# Altium PCB M18PNP新 - 副本.PCBDOC
Units mil, origin at the board's own origin, x right, y up, seen from the top; angles counter-clockwise.
Board outline 6000 x 4000 mil, 2 copper layers (Top Layer, Bottom Layer); 52 components, 35 nets, 144 pads, 8 vias.
Unrouted connection lines stored in the file: 75.
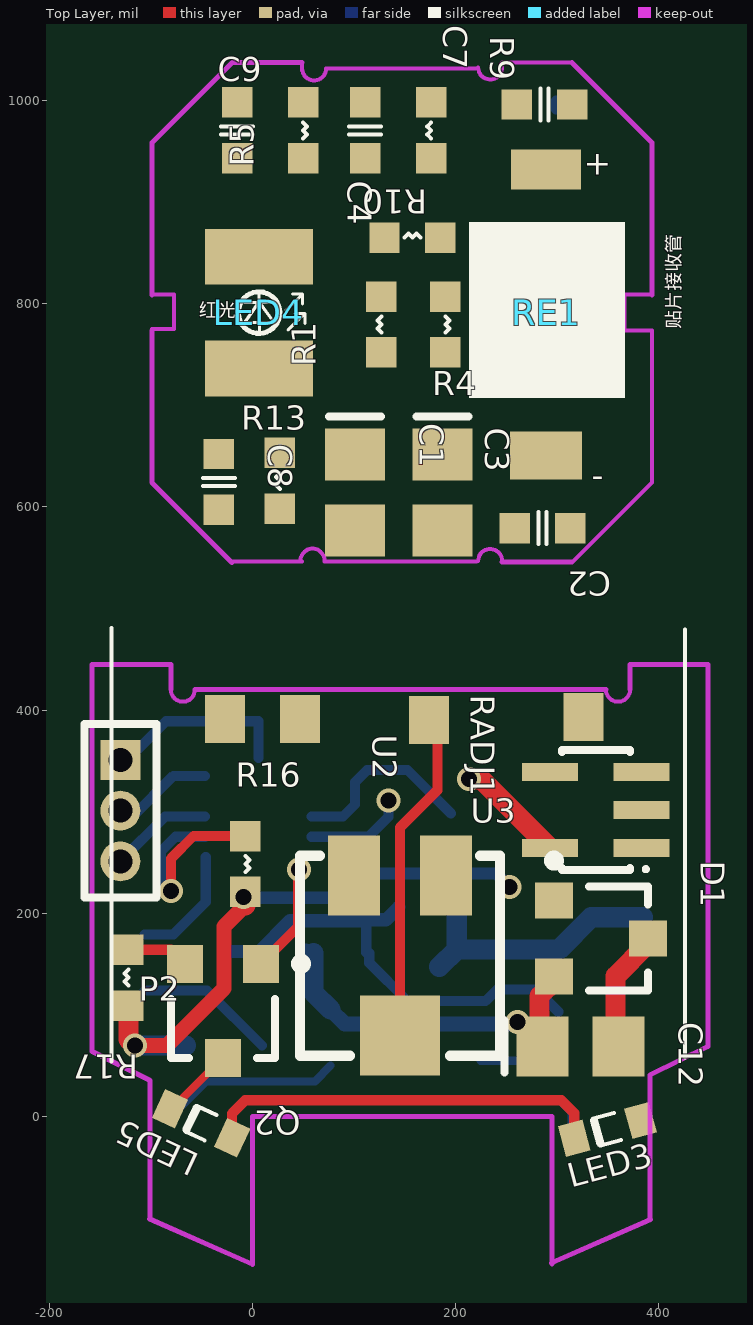
[diagram p0: Top Layer view]
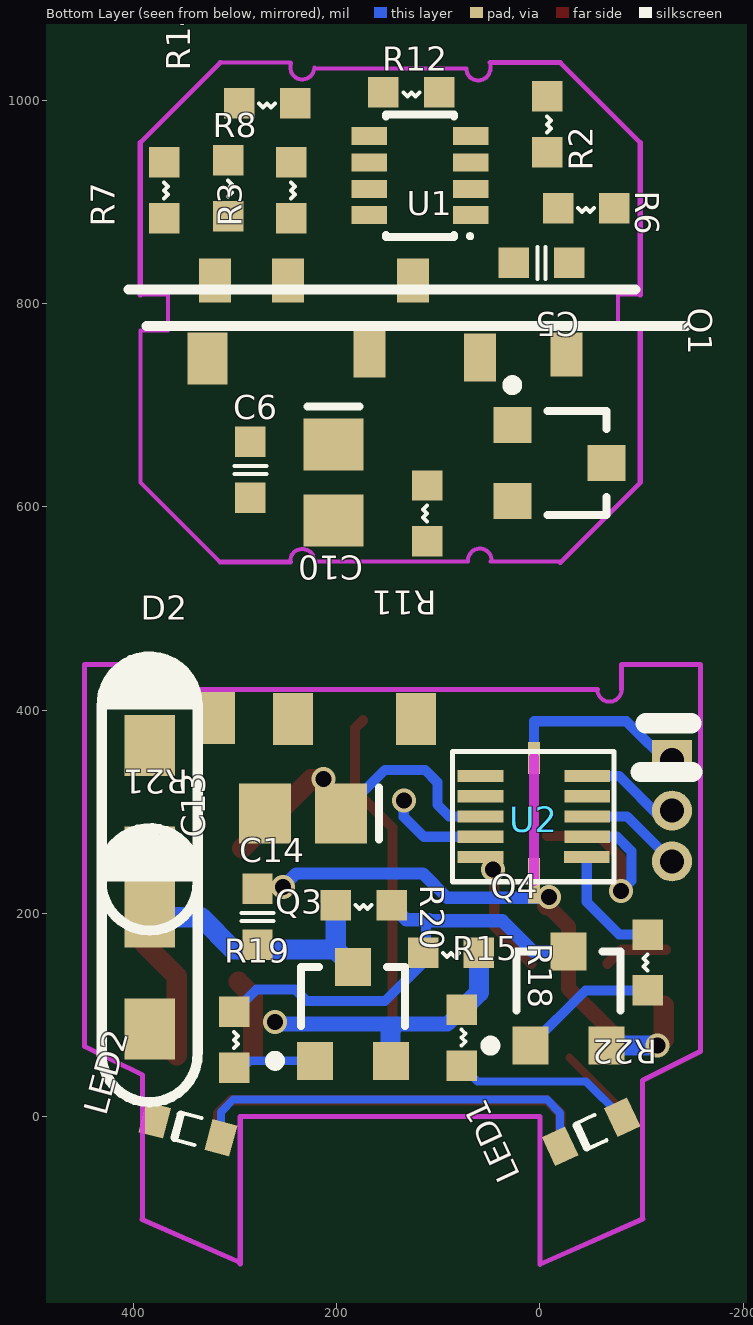
[diagram p1: Bottom Layer view, seen from below]

## Layer stack, top to bottom
Top Layer: signal copper 1.4
Dielectric: dielectric 12.6, FR-4, Dk 4.8
Bottom Layer: signal copper 1.4

## Board outline
-1163.58,-1077.4 4836.42,-1077.4 4836.42,2922.6 -1163.58,2922.6

## Design rules (kind name [scope] priority, off if disabled: settings)
Clearance [All] p1: gap=10
PolygonConnect [All] p1: connectstyle=Relief reliefconductorwidth=10 reliefentries=4 polygonreliefangle="90 Angle"
RoutingVias [All] p1: holewidth=15.75 width=23.62 viastyle="Through Hole" minholewidth=15.75 minwidth=23.62 maxholewidth=15.75 maxwidth=23.62
SilkscreenOverComponentPads [All] p1: minsilkscreentomaskgap=10
SolderMaskExpansion [All] p1: expansion=4
TestPointUsage [All] p1: valid=0 allowmultiple=FALSE
Testpoint [All] p1: side=15 testpointundercomponent=TRUE minsize=40 maxsize=100 preferedsize=60 minholesize=0 maxholesize=40 preferedholesize=32 testpointgrid=1 style=1023 order=0-112345678
Width [All] p1: maxlimit=30 minlimit=8 preferedwidth=10
23 further rules are at their usual default settings.

## Components (designator, comment, footprint, x,y, rotation, side; value= is the part's Value field where it differs from the comment)
C1 "105" C0805 101,614 r270 top
C2 "C104" C0603 313,579 r180 top
C3 "C106" C0805 187,614 r270 top
C4 "C104" C0603 111,943 r90 top
C5 "C104" C0603 -29,840 r0 bottom
C6 "C104" C0603 285,609 r90 bottom
C7 "C104" C0603 260,996 r0 top
C8 "C104" C0603 -33,652 r270 top
C9 "C104" C0603 -15,943 r90 top
C10 "C106" C0805 203,624 r270 bottom
C12 "105" C0805 323,69 r0 top
C13 "C106" C0805 233,298 r0 bottom
C14 "C104" C0603 278,169 r90 bottom
D1 "sm05t1g" SOT23A 343,175 r270 top
D2 "tvs36V" 3216A 385,365 r90 bottom
LED1 "绿" d0603 -81,-1 r335 bottom
LED2 "绿" d0603 314,-21 r15 bottom
LED3 "橙色" d0603 382,-4 r195 top
LED4 "红光" LED-1210#1 6.47,791.16 r0 top locked
LED5 "橙色" d0603 -20,-21 r155 top
P2 "MHDR1X3" MHDR1X3 -130,351 r270 top
Q1 "BC817" SOT23A -19,643 r270 bottom
Q2 "c124" SOT23A -29,104 r180 top
Q3 "BC807" SOT23A 184,101 r180 bottom
Q4 "BC817" SOT23A -28,116 r180 bottom
R1 "100" R0603 127,752 r90 top
R2 "390K" R0603-A -7,1004 r90 bottom
R3 "100K" R0603-A 245,939 r90 bottom
R4 "R101" R0603-A 190,807 r90 top
R5 "0" R0603-A 50,998 r90 top
R6 "0" R0603-A -73,894 r180 bottom
R7 "10K" R0603-A 370,939 r90 bottom
R8 "20" R0603-A 307,941 r90 bottom
R9 "R103" R0603-A 176,943 r270 top
R10 "R562" R0603-A 130,865 r180 top
R11 "10K" R0603-A 111,566 r270 bottom
R12 "R202" R0603-A 99,1008 r180 bottom
R13 "15" R0603-A 27,598 r270 top
R14 "R562" R0603-A 241,997 r180 bottom
R15 "10K" R0603-A 77,105 r90 bottom
R16 "2K" R0603-A -7,276 r90 top
R17 "2K" R0603-A -122,109 r270 top
R18 "10K" R0603-A 60,161 r180 bottom
R19 "10K" R0603-A 301,103 r90 bottom
R20 "R000" R0603-A 146,208 r180 bottom
R21 "SMD1206P016" 3216A 385,196 r90 bottom
R22 "2K" R0603-A -106,124 r270 bottom
RADJ1 "20K" POT4MM-2 145.15,158.2 r270 top
RE1 "贴片接收管" LED-1210#2 289.06,791.06 r180 top locked
U1 "OPA2338" SOT23-8 68,887 r90 bottom
U2 "C8051F300" IC* -19,316 r270 top
U3 "MIC5233-3.3BM5" SOT-457 383,264 r90 top

## Footprints (in the part's own frame and the unit in brackets; to place one, negate y for a bottom-side part, rotate by r counter-clockwise, add the part's x,y. Pads: shape width x height; smd on the part's side, far side on the other; paste and mask are expansions set on the pad)
3216A [mil]
  rect 60x50 smd: 1(0.12,-0.87) 2(-109.88,-0.87)
  silkscreen extent -182,-48 88,46
C0603 [mil]
  rect 30x30 smd: 1(0,0) 2(55,0)
  silkscreen extent 24,-16 31,16
C0805 [mm] "Chip Capacitor; Body 2.0 x 1.2 mm (LxW typ)"
  rect 1.3x1.5 smd: 1(-0.95,0) 2(0.95,0)
  silkscreen extent -1.9,-0.65 -1.9,0.65
d0603 [mm]
  rect 0.635x0.8 smd: 1(0,0) 2(1.715,0)
  silkscreen extent 0.6,-0.35 1.13,0.35
IC* [mil]
  rect 12x45 smd far side: 1(-19.21,77.42) 2(0.79,77.42) 3(20.79,77.42) 4(40.79,77.42) 7(40.79,-27.58) 8(20.79,-27.58) 9(0.79,-27.58) 10(-19.21,-27.58)
  rect 12x45 smd far side mask+2: 5(60.79,77.42) 6(60.79,-27)
  rect 31.5x12 smd far side: 11(-37,25)
  rect 45x12 smd far side: 11(84,25)
LED-1210#1 [mil]
  rect 106.3x55 smd: 1(0,-55) 2(0,55)
  silkscreen extent -20,-20 45,20
LED-1210#2 [mil]
  rect 68.9x39.37 smd: 1(0,-140.75)
  rect 70.87x47.24 smd: 2(0,140.75)
  silkscreen extent -20,-20 45,20
MHDR1X3 [mm] "Connector; Header; 3 Position"
  rect 1x1 hole 0.6: 1(0,0)
  round 1 hole 0.6: 2(1.27,0) 3(2.54,0)
  silkscreen extent -0.9,-0.9 3.44,0.9
POT4MM-2 [mm] "Square Trimming Potentiometer"
  rect 2x1.3 smd: CCW(-2,-1.15) CW(-2,1.15)
  rect 2x2 smd: W(2,0)
  silkscreen extent -2.5,-2.5 2.5,2.5
R0603 [mil]
  rect 30x30 smd: 1(0,0) 2(55,0)
  silkscreen extent 20,0 35,4
R0603-A [mil]
  rect 30x30 smd: 1(0,0) 2(-55,0)
  silkscreen extent -35,-4 -20,0
SOT23-8 [mm]
  rect 0.45x0.889 smd: 1(0,0) 2(0.66,0) 3(1.32,0) 4(1.98,0) 5(1.98,2.54) 6(1.32,2.54) 7(0.66,2.54) 8(0,2.54)
  silkscreen extent -0.57,-0.03 2.52,2.12
SOT23A [mm] "SOT-23; 3 Leads; Body 3.0 x 2.5 mm, inc. leads (LxW max)"
  rect 0.9x0.95 smd: 1(-0.95,-1.175) 2(0.95,-1.175) 3(0,1.175)
  silkscreen extent -2.07,-1.3 1.3,1.18
SOT-457 [mm]
  rect 0.45x1.397 smd: 1(0,0) 2(0.95,0) 3(1.9,0) 4(1.9,2.286) 5(0,2.286)
  silkscreen extent -0.57,-0.16 2.45,1.99

## Part data
C1 C2 C3 C4 C5 C6 C7 C8 C9 C10 C12 C13 C14: library part Cap, "Capacitor"
D2: library part "D Schottky", "Schottky Diode"
LED1 LED2 LED3 LED4 LED5: library part LED0, "Typical INFRARED GaAs LED"
P2: "Header, 3-Pin"
Q1 Q2 Q4: library part MMBT3904, "NPN Switching Transistor"
Q3: library part MMBT3906, "PNP Switching Transistor"
R1 R2 R3 R4 R5 R6 R7 R8 R9 R10 R11 R12 R13 R14 R15 R16 R17 R18 R19 R20 R21 R22: library part Res2, "Resistor"
RADJ1: library part "RPot SM", "Square Trimming Potentiometer"
RE1: library part "Photo Sen", "Photosensitive Diode"
U1: library part LM833D, "Dual Low Noise, Audio Amplifier"
U2: library part PIC16C505
U3: library part TPS77001

## Free pads (board coordinates)
  rect 39.37x47.24 smd: 6(-27,391) 6(47,391) 6(174,390) 6(326,393)
  rect 31.5x43.31 smd far side: 6(-26,750) 6(125,823) 6(248,823) 6(320,823)
  rect 31.5x47.24 smd far side: 6(59,747) 6(168,751)
  rect 39.37x51.18 smd far side: 7(122,391) 7(243,391) 7(320,392) 7(327,746)

## Via types
v1: diameter 23.62, hole 15.75, Top Layer to Bottom Layer, 8 vias

## Nets (pads, with @x,y where several pads share a name; then routed paths per layer and width w, separated by ;. In a path a pad name is that pad's centre, name@x,y a point inside that pad or via, vN(x,y) a via of type N, cw(c..) or ccw(c..) an arc to the next point about the centre after c; other vN are vias at no path point)
0V: D1.1
3.3V: C3.1 C10.1 C13.1 pad.6@248,823 pad.7@243,391 R4.1 R10.2 U1.8 U2.3 U3.5 | length 295
  Top Layer w20: v1(213,332) 225,332 U3.5
  Bottom Layer w10: U2.3 89.21,295.21 101,307 101,329 113,341 152.6,341 C13.1
+24V: C12.1 D1.2 LED3.1 pad.6@326,393 pad.7@327,746 Q3.2 R1.1 R15.1 R18.1 U3.1 U3.3 | length 401.2
  Top Layer w19.68: C12.1@282.6,60 282.6,118.46 D1.2@296.74,132.6
  Bottom Layer w8: R18.1@53,161 R18.1@53,166 ; 147,84 147,57.34 Q3.2@149.6,54.74
  Bottom Layer w15: R15.1 90.94,91.06 139.94,91.06 259.06,91.06 v1(261,93)
  Bottom Layer w19.68: R18.1 60,122 R15.1 ; Q3.2 146.6,57.74 147,88 ; 146.6,84.4 147,84
ADCIN: R3.2 R8.1 U1.7
ADCIN1: C6.2 pad.6@125,823 pad.7@122,391 R8.2 U2.1
GND: C1.2 C2.2 C3.2 C6.1 C7.2 C8.2 C9.2 C10.2 C12.2 C13.2 C14.2 D1.3 D2.1 LED2.2 P2.1 pad.6@320,823 pad.7@320,392 Q4.2 R9.2 R11.1 R13.1 R14.2 R16.2 R17.1 RADJ1.CW U1.4 U2.11 U3.2 | length 909.7
  Top Layer w10: R16.2@-7,216 R16.2
  Top Layer w15: v1(-115.74,69.74) -84.26,69.74 -28,126 -28,187 R16.2@-7,208
  Top Layer w20: R17.1 -122,76 v1(-115.74,69.74) ; R16.2@-7,208 R16.2@-7,216 ; C12.2@357.4,60 357.4,138.14 D1.3@389.26,170
  Bottom Layer w10: P2.1@-130,344 -85,389 6,389 U2.11@6,353 ; Q4.2@-76.74,69.74 Q4.2
  Bottom Layer w12: v1(-9,216) -8.19,215.19 91.19,215.19 115,239 240,239 v1(253,226)
  Bottom Layer w20: v1(-115.74,69.74) Q4.2
LEDCTL: pad.6@47,391 pad.6@59,747 Q1.1 R11.2 U2.4 | length 99.8
  Bottom Layer w10: U2.4 114.21,275.21 134,295 v1(134,311)
NetC1_1: C1.1 LED4.1 R1.2
NetC2_1: C2.1 R4.2 RE1.2
NetC4_1: C4.1 R9.1 RE1.1
NetC4_2: C4.2 R5.1
NetC5_1: C5.1 pad.6@168,751 pad.6@174,390 R6.2 RADJ1.W | length 329.1
  Top Layer w10: RADJ1.W 145.15,284.15 182,321 182,382 pad.6@174,390
NetC5_2: C5.2 R7.2
NetC7_1: C7.1 R12.2 R14.1 U1.5 | length 9
  Bottom Layer w10: 299,991 299,1000
NetC8_1: C8.1 Q1.2 R13.2
NetC9_1: C9.1 R10.1 R12.1 U1.3
NetC14_1: C14.1 D2.2 Q3.3 R20.2 R21.1 | length 264.1
  Bottom Layer w20: Q3.3 Q3.3@201,164.26 ; R20.2 Q3.3@201,164.26 ; R21.1 333.6,196.12 301.74,164.26 Q3.3@201,164.26
NetLED1_1: LED1.1 R15.2 | length 179.1
  Bottom Layer w8: LED1.1 -45.5,34.5 61.5,34.5 R15.2
NetLED1_2: LED1.2 LED2.1 | length 398.6
  Bottom Layer w8: LED1.2@-19.82,-25.53 -19.82,3.51 -6.83,16.5 301.83,16.5 314,4.33 LED2.1
NetLED3_2: LED3.2 LED5.1 | length 392.2
  Top Layer w10: LED5.1 -20,3 -7,16 304,16 316.8,3.2 LED3.2@316.8,-17.47
NetLED4_2: LED4.2 Q1.3
NetLED5_2: LED5.2 Q2.3 | length 73
  Top Layer w8: LED5.2 -79.21,7.53 Q2.3
NetP2_2: P2.2 U2.10 | length 100.5
  Bottom Layer w10: P2.2@-130,294 -119,294 -77.79,335.21 U2.10
NetP2_3: P2.3 U2.8 | length 106.7
  Bottom Layer w10: P2.3@-130,244 P2.3@-126.5,247.5 ; P2.3 -85.79,295.21 U2.8
NetQ2_2: Q2.2 R17.2 | length 63.3
  Top Layer w10: R17.2@-124,164 R17.2 -80.14,164 Q2.2
NetQ3_1: Q3.1 R19.2 | length 66.1
  Bottom Layer w8: Q3.1@224.4,54.74 285.26,54.74 R19.2@289,51
NetQ4_1: Q4.1 R22.1 | length 137.9
  Bottom Layer w10: R22.1 -44.86,124 Q4.1
NetQ4_3: Q4.3 R18.2 R19.1 R20.1 | length 452.5
  Bottom Layer w10: 109.5,193.5 112,191 112,161.63 R18.2@115,158.63 ; R18.2 R18.2@115,158.63 ; R19.1 279,125 241,125 229.56,113.56 152.57,113.56 115,151.13 R18.2@115,158.63
  Bottom Layer w13: Q4.3 6.51,162.26 36.94,192.69 108.69,192.69 109.5,193.5 131.5,193.5 R20.1@144,206
NetR2_1: R2.1 R5.2 U1.2
NetR2_2: pad.6@-26,750 pad.6@-27,391 R2.2 R6.1 RADJ1.CCW U1.1
NetR3_1: R3.1 R7.1 U1.6
NetR16_1: R16.1 U2.7 | length 206.6
  Top Layer w10: v1(-80,222) -80,254 -58,276 R16.1
  Bottom Layer w10: v1(-80,222) -90,232 -90,261 -75.79,275.21 U2.7
NPNOUT: R22.2 U2.6 | length 117.5
  Bottom Layer w10: R22.2 -78,179 -46,211 U2.6
POUT: R21.2
STSLED: Q2.1 U2.5 | length 109.1
  Top Layer w10: Q2.1 45,186.86 v1@45,243
  Bottom Layer w10: v1(46,243) v1@47.22,243
pads on no net: U2.2 U2.9 U3.4

## Polygon pours and split planes (outlines as drawn)
no net on Top Solder "Bottom Solder-No Net" (solid): 10,-155 10,-73.55 -8.53,-57.37 -39.41,-57.37 -57.94,-57.37 -76.47,-41.18 -95,-25 -114.5,-25 -114.5,-106.47 -115,-106.9
no net on Top Solder "Bottom Solder-No Net" (solid): 280,-155 280,-73.24 298.53,-57 329.41,-57 347.94,-57 366.47,-40.75 385,-24.51 404.5,-24.51 404.5,-106.29 405,-106.72
no net on Bottom Solder "Bottom Solder-No Net" (solid): 15,-155 15,-73.55 -4.27,-57.37 -36.39,-57.37 -55.66,-57.37 -74.93,-41.18 -94.2,-25 -114.48,-25 -114.48,-106.47 -115,-106.9
no net on Bottom Solder "Bottom Solder-No Net" (solid): 285,-155 285,-73.24 302.79,-57 332.44,-57 350.22,-57 368.01,-40.75 385.8,-24.51 404.52,-24.51 404.52,-106.29 405,-106.72

## Keep-outs
Bottom Layer:
  lines w10 net GND: 6,232 6,353
Keep-Out Layer:
  lines w3.94: -98.74,775 -77,775 -77,808.74 -98.74,808.74 ; -80.28,420 ccw(c-68.46,420) -56.65,420 ; -20,546.1 48.9,546.1 ; 47.38,547 cw(c59.19,547) 71,547 ; 48.9,1029.49 48.9,1037.48 ; 48.9,1031.49 ccw(c60.71,1031.49) 72.52,1031.49 222.13,1031.49 ; 71,546 220.61,546 ; 222.13,546.75 cw(c233.94,546.75) 245.75,546.75 ; 222.13,1032.49 ccw(c233.94,1032.49) 244.93,1036.81 ; 245.75,1037.13 314.65,1037.13 ; 314.65,545 393.39,623.74 ; 348.03,420 ccw(c359.84,420) 371.65,420 ; 366.26,773.74 393.39,773.74 ; 366.26,774.06 366.26,808.74 393.39,808.74 ; 393.39,773.74 393.39,624.09 393.39,773.74
  lines w5: -101.19,-100.92 0,-145.49 0,0 295,0 ; -100.79,-100.92 -100.79,35.39 -157.87,63.94 -157.87,445 -80.28,445 -80.28,420 ; -98.74,623.74 -20,545 ; -98.74,624.09 -98.74,773.74 ; -98.74,808.74 -98.74,958.39 -20,1037.13 ; -56.65,420 348.03,420 ; -20,1037.48 48.9,1037.48 ; 245.75,545.75 314.65,545.75 ; 294.62,-144.14 391.73,-101.36 ; 314.65,1037.13 393.39,958.39 393.39,808.74 ; 371.65,420 371.65,445 448.43,445 448.43,69.11 391.34,40.89 391.34,-100.47 ; 295,0 295,-145 295,0

## Silkscreen, mask and mechanical layers (free items; w line width, h text height)
Top Overlay:
  region: 366.85,707.32 366.85,880.55 213.31,880.55 213.31,707.32
  lines w3.94: -138.47,54.24 -138.47,480.53 ; 425.6,57.82 425.6,479.4
  text "+" at 326,927 h23.62
  text "-" at 334,620 h23.62
Bottom Overlay:
  lines w10: -144,778 387,778 ; -94,814 405,814
  lines w20: -150,339 -99,339 ; -149,387 -104.14,387